# EAGLE board pcf8574 (EAGLE 6.4)
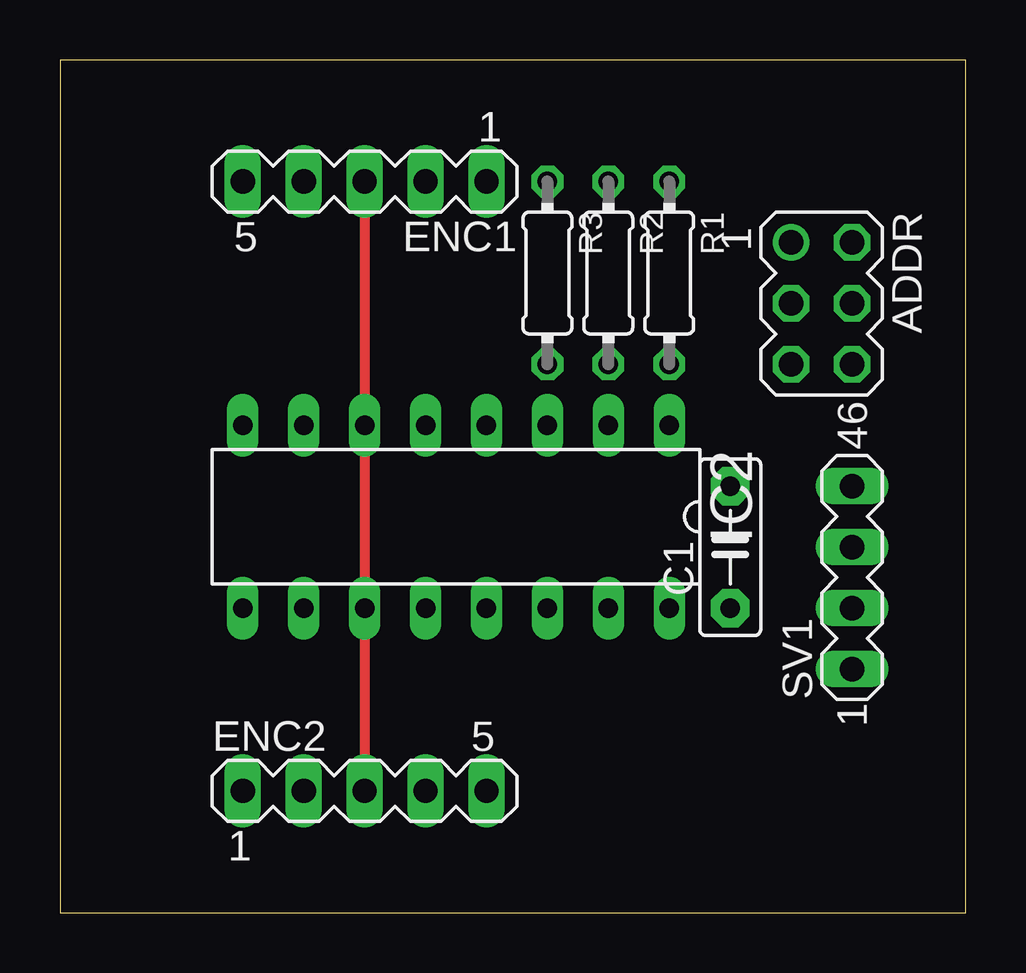
[diagram p0: board, top side]
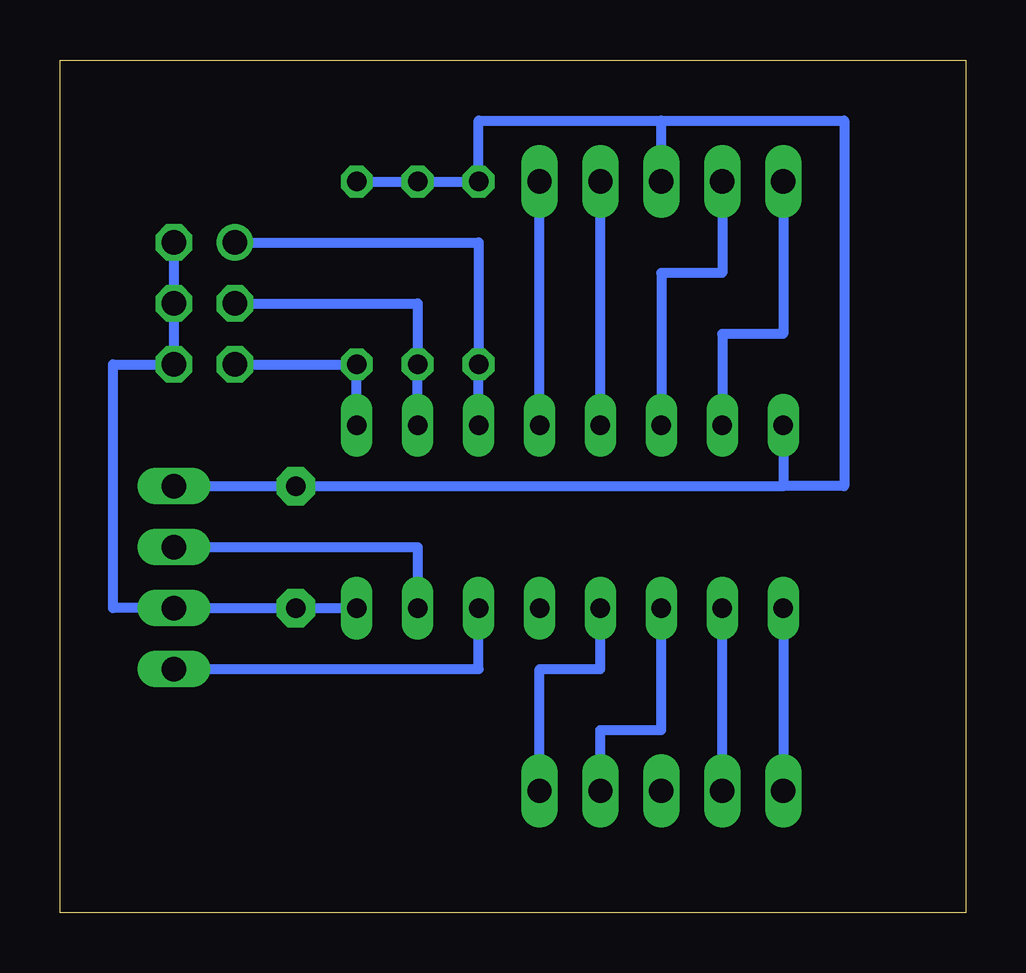
[diagram p1: board, bottom side, seen from below]

Size 37.77 x 35.55 mm. Coordinates in mm from the lower left corner, seen from the top.
Outline: 0,0 37.77,0 37.77,35.55 0,35.55 0,0
Copper layers (1*16): Top 0.035mm / dielectric 1.5mm / Bottom 0.035mm
Design rules "default": minimum track width 10mil, minimum drill 24mil, track to track 8mil, track to pad 8mil, pad to pad 8mil, via to via 8mil, smd to smd 8mil, copper to edge 40mil, drill to drill 8mil, minimum pad ring 10mil, minimum via ring 8mil, stop-mask expansion 4mil, vias tented up to drill 0mil, thermal gap 10mil

## Footprints (pad centres in the part's own frame; a part is rotated, then mirrored left to right if it is on the bottom)
MA03-2 = drill 1.016: 1 -2.54,-1.27 | drill 1.016 octagon: 2 -2.54,1.27; 3 0,-1.27; 4 0,1.27; 5 2.54,-1.27; 6 2.54,1.27
C5B2.5 = drill 0.813 pad 1.6 octagon: 1 -2.54,0; 2 2.54,0
MA05-1 = drill 1.016 long: 1 -5.08,0; 2 -2.54,0; 3 0,0; 4 2.54,0; 5 5.08,0
DIL16 = drill 0.813 long: 1 -8.89,-3.81; 2 -6.35,-3.81; 3 -3.81,-3.81; 4 -1.27,-3.81; 5 1.27,-3.81; 6 3.81,-3.81; 7 6.35,-3.81; 8 8.89,-3.81; 9 8.89,3.81; 10 6.35,3.81; 11 3.81,3.81; 12 1.27,3.81; 13 -1.27,3.81; 14 -3.81,3.81; 15 -6.35,3.81; 16 -8.89,3.81
0204/7 = drill 0.813 octagon: 1 -3.81,0; 2 3.81,0
MA04-1 = drill 1.016 long: 1 -3.81,0; 2 -1.27,0; 3 1.27,0; 4 3.81,0

## Placement (x,y rotation side)
ADDR  [MA03-2]  31.75,25.4 270 top
C1  [C5B2.5]  27.94,15.24 90 top
ENC1  [MA05-1]  12.7,30.48 180 top
ENC2  [MA05-1]  12.7,5.08 0 top
IC2  PCF8574P  [DIL16]  16.51,16.51 180 top
R1  [0204/7]  25.4,26.67 270 top
R2  [0204/7]  22.86,26.67 270 top
R3  [0204/7]  20.32,26.67 270 top
SV1  [MA04-1]  33.02,13.97 90 top

## Library data of the parts
ADDR ENC1 ENC2 SV1 = con-lstb; OC_FARNELL: unknown; OC_NEWARK: unknown
C1 = capacitor-wima
IC2 = micro-philips; MPN: PCF8574PN; OC_FARNELL: 204020; OC_NEWARK: 11N8515
R1-R3 = resistor

## Nets
N$1: IC2.14 SV1.1
N$2: ADDR.2 ADDR.4 ADDR.6 C1.1 IC2.16 SV1.2
N$3: ENC2.5 IC2.12
N$4: ADDR.5 IC2.1 R1.2
N$5: ADDR.3 IC2.2 R2.2
N$6: ADDR.1 IC2.3 R3.2
N$7: IC2.15 SV1.3
N$8: ENC2.4 IC2.11
N$10: ENC2.2 IC2.10
N$11: ENC2.1 IC2.9
N$12: ENC1.4 IC2.6
N$13: ENC1.2 IC2.5
N$14: ENC1.1 IC2.4
N$15: ENC1.5 IC2.7
N$17: C1.2 ENC1.3 ENC2.3 IC2.8 R1.1 R2.1 R3.1 SV1.4

## Tracks (layer width: path | path; a pad name or v marks a point on that pad's centre or on a via)
N$1
  Bottom 0.406: SV1.1 20.32,10.16 IC2.14
N$2
  Bottom 0.406: ADDR.2 ADDR.4 ADDR.6 35.56,22.86 35.56,12.7 SV1.2 C1.1 IC2.16
N$3
  Bottom 0.406: ENC2.5 17.78,10.16 15.24,10.16 IC2.12
N$4
  Bottom 0.406: IC2.1 R1.2 ADDR.5
N$5
  Bottom 0.406: IC2.2 R2.2 22.86,25.4 ADDR.3
N$6
  Bottom 0.406: IC2.3 R3.2 20.32,27.94 ADDR.1
N$7
  Bottom 0.406: SV1.3 22.86,15.24 IC2.15
N$8
  Bottom 0.406: ENC2.4 15.24,7.62 12.7,7.62 IC2.11
N$10
  Bottom 0.406: ENC2.2 IC2.10
N$11
  Bottom 0.406: IC2.9 ENC2.1
N$12
  Bottom 0.406: ENC1.4 10.16,26.67 12.7,26.67 IC2.6
N$13
  Bottom 0.406: IC2.5 ENC1.2
N$14
  Bottom 0.406: IC2.4 ENC1.1
N$15
  Bottom 0.406: ENC1.5 7.62,24.13 10.16,24.13 IC2.7
N$17
  Top 0.406: ENC1.3 ENC2.3
  Bottom 0.406: R3.1 R2.1 R1.1 R3.1 | R3.1 20.32,33.02 12.7,33.02 | IC2.8 7.62,17.78 | SV1.4 C1.2 7.62,17.78 | ENC1.3 12.7,33.02 | 12.7,33.02 5.08,33.02 5.08,17.78 7.62,17.78